# Altium PCB stand.PcbDoc (part 2 of 2)
Units mm, origin at the board's own origin, x right, y up, seen from the top; angles counter-clockwise.
Board outline 152.4 x 292.65 mm, 2 copper layers (Top Layer, Bottom Layer); 16 components, 320 nets, 640 pads, 0 vias.
Unrouted connection lines stored in the file: 32.
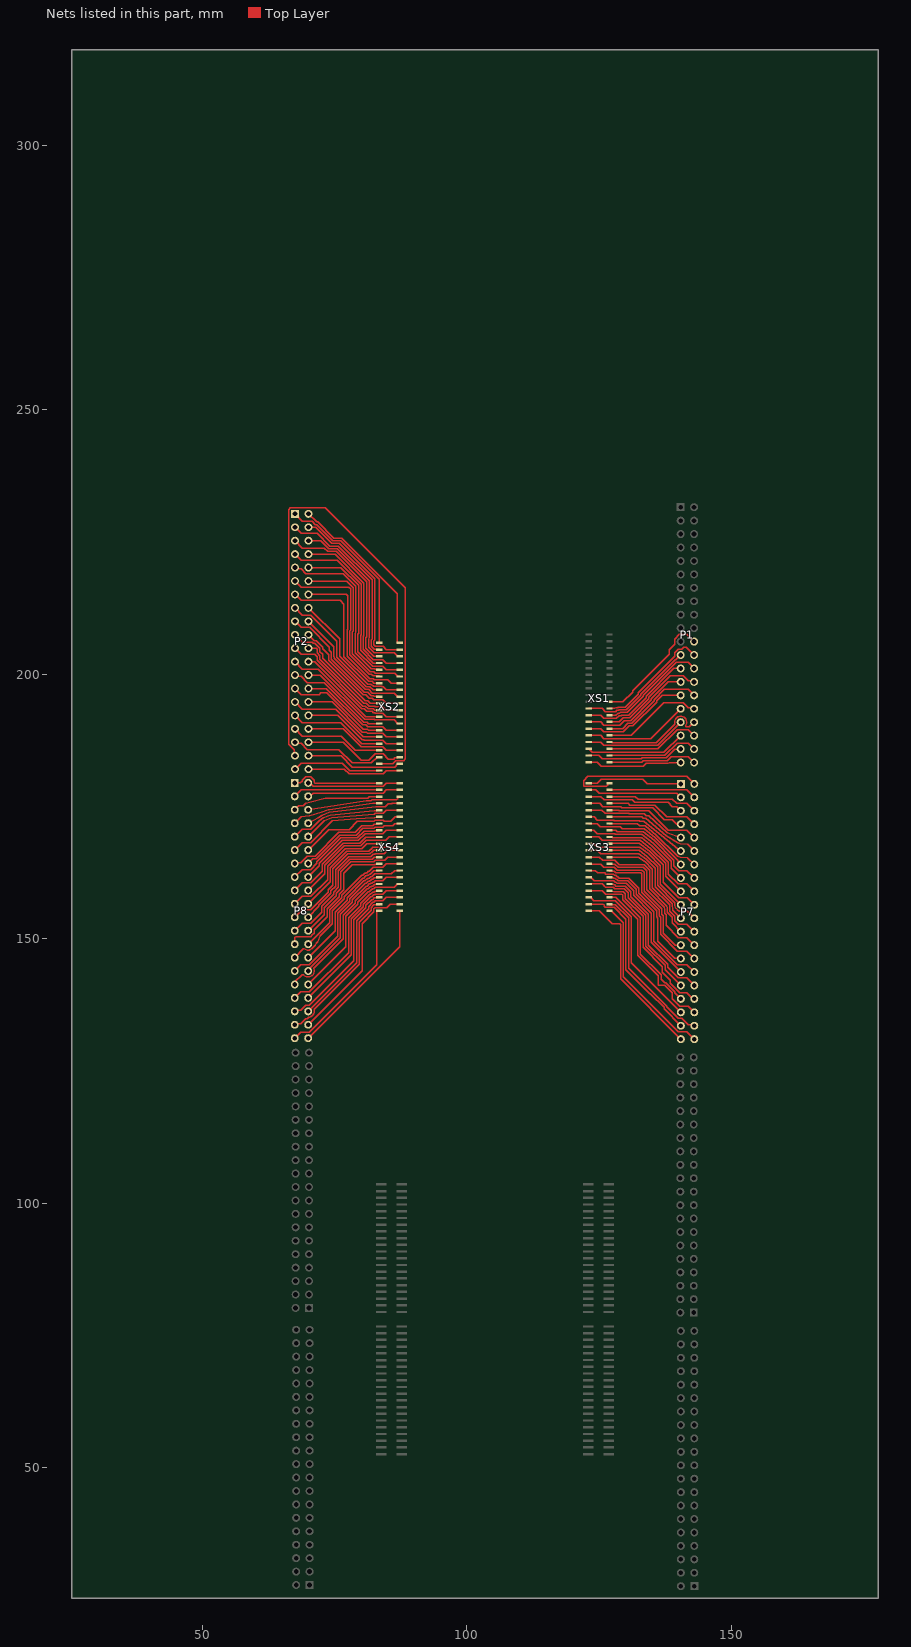
[diagram p2: the nets of this part, all layers, seen from the top]

## Nets (pads, with @x,y where several pads share a name; then routed paths per layer and width w, separated by ;. In a path a pad name is that pad's centre, name@x,y a point inside that pad or via, vN(x,y) a via of type N, cw(c..) or ccw(c..) an arc to the next point about the centre after c; other vN are vias at no path point) (continued)
NetP1_22: P1.22 XS1.22 | length 23.1
  Top Layer w0.254: XS1.22@127.008,194.835 129.56,194.835 131.4,196.675 131.4,196.913 138.328,203.841 138.328,204.661 139.344,205.677 139.344,206.678 140.241,207.575 141.65,207.575 P1.22@143.015,206.21
NetP1_23: P1.23 XS1.23 | length 22.2
  Top Layer w0.254: XS1.23@123.108,193.565 125.644,193.565 126.25,192.959 128.17,192.959 128.424,193.213 128.775,193.213 128.873,193.311 130.191,193.311 132.924,196.044 132.924,196.282 139.411,202.769 139.574,202.769 P1.23@140.475,203.67
NetP1_24: P1.24 XS1.24 | length 22
  Top Layer w0.254: XS1.24@127.008,193.565 128.057,193.565 128.213,193.721 128.565,193.721 128.663,193.819 129.981,193.819 132.416,196.254 132.416,196.492 139.344,203.42 139.344,204.138 140.007,204.801 140.665,204.801 141.014,205.15 141.535,205.15 P1.24@143.015,203.67
NetP1_25: P1.25 XS1.25 | length 21.7
  Top Layer w0.254: XS1.25@123.108,192.295 125.37,192.295 125.976,191.689 128.337,191.689 128.845,192.197 129.196,192.197 129.294,192.295 130.612,192.295 133.94,195.623 133.94,195.861 139.209,201.13 P1.25@140.475,201.13
NetP1_26: P1.26 XS1.26 | length 20.7
  Top Layer w0.254: XS1.26@127.008,192.295 128.224,192.295 128.634,192.705 128.985,192.705 129.083,192.803 130.402,192.803 133.432,195.833 133.432,196.072 139.621,202.261 141.884,202.261 P1.26@143.015,201.13
NetP1_27: P1.27 XS1.27 | length 21.1
  Top Layer w0.254: XS1.27@123.108,191.025 125.37,191.025 125.976,190.419 128.972,190.419 129.832,191.279 131.033,191.279 134.956,195.202 134.956,195.44 138.106,198.59 P1.27@140.475,198.59
NetP1_28: P1.28 XS1.28 | length 20.2
  Top Layer w0.254: XS1.28@127.008,191.025 127.516,191.025 128.859,191.025 129.621,191.787 130.823,191.787 134.448,195.412 134.448,195.651 138.518,199.721 140.943,199.721 141.884,198.78 142.825,198.78 P1.28@143.015,198.59
NetP1_29: P1.29 XS1.29 | length 20.6
  Top Layer w0.254: XS1.29@123.108,189.755 125.37,189.755 125.976,189.149 129.607,189.149 130.721,190.263 131.454,190.263 135.972,194.781 135.972,195.02 137.002,196.05 P1.29@140.475,196.05
NetP1_30: P1.30 XS1.30 | length 19.7
  Top Layer w0.254: XS1.30@127.008,189.755 129.494,189.755 130.51,190.771 131.243,190.771 135.464,194.992 135.464,195.23 137.415,197.181 141.884,197.181 P1.30@143.015,196.05
NetP1_31: P1.31 XS1.31 | length 20
  Top Layer w0.254: XS1.31@123.108,188.485 125.37,188.485 125.976,187.879 134.844,187.879 P1.31@140.475,193.51
NetP1_32: P1.32 XS1.32 | length 19
  Top Layer w0.254: XS1.32@127.008,188.485 131.134,188.485 137.29,194.641 140.943,194.641 141.884,193.7 142.825,193.7 P1.32@143.015,193.51
NetP1_33: P1.33 XS1.33 | length 19.4
  Top Layer w0.254: XS1.33@123.108,187.215 125.37,187.215 125.976,186.609 136.114,186.609 P1.33@140.475,190.97
NetP1_34: P1.34 XS1.34 | length 20.5
  Top Layer w0.254: XS1.34@127.008,187.215 127.481,187.117 135.904,187.117 139.372,190.586 139.372,190.691 139.372,190.718 cw(c140.475,190.97) 141.446,190.389 141.446,190.323 141.446,190.218 141.52,190.143 141.594,190.069 142.114,190.069 P1.34@143.015,190.97
NetP1_35: P1.35 XS1.35 | length 19
  Top Layer w0.254: XS1.35@123.108,185.945 123.772,185.281 127.766,185.281 127.797,185.25 137.295,185.25 P1.35@140.475,188.43
NetP1_36: P1.36 XS1.36 | length 18
  Top Layer w0.254: XS1.36@127.008,185.945 136.168,185.945 139.784,189.561 141.884,189.561 P1.36@143.015,188.43
NetP1_37: P1.37 XS1.37 | length 18.4
  Top Layer w0.254: XS1.37@123.108,184.675 125.002,184.675 125.628,184.048 133.046,184.048 133.232,184.234 137.716,184.234 139.344,185.862 140.447,185.862 P1.37@140.475,185.89
NetP1_38: P1.38 XS1.38 | length 17.4
  Top Layer w0.254: XS1.38@127.008,184.675 132.486,184.675 132.553,184.742 137.505,184.742 139.784,187.021 141.884,187.021 P1.38@143.015,185.89
NetP1_39: P1.39 XS1.39 | length 17.9
  Top Layer w0.254: XS1.39@123.108,183.405 124.689,183.405 125.419,182.675 133.399,182.675 133.942,183.218 138.137,183.218 138.269,183.35 P1.39@140.475,183.35
NetP1_40: P1.40 XS1.40 | length 16.9
  Top Layer w0.254: XS1.40@127.008,183.405 133.121,183.405 133.442,183.726 137.926,183.726 138.681,184.481 141.884,184.481 P1.40@143.015,183.35
NetP2_1: P2.1 XS2.1 | length 33
  Top Layer w0.254: P2.1@67.575,230.355 68.984,228.946 70.806,228.946 71.429,228.323 71.67,228.323 74.718,225.275 76.185,225.275 83.482,217.978 XS2.1@83.482,205.962
NetP2_2: P2.2 XS2.2 | length 32.8
  Top Layer w0.254: P2.2@70.115,230.355 71.639,228.831 71.881,228.831 74.929,225.783 76.396,225.783 86.909,215.27 86.909,206.06 87.007,205.962 XS2.2@87.382,205.962
NetP2_3: P2.3 XS2.3 | length 33
  Top Layer w0.254: P2.3@67.575,227.815 68.73,226.66 71.777,226.66 74.178,224.259 75.765,224.259 82.127,217.897 82.127,206.689 81.993,206.555 81.993,205.369 82.572,204.79 83.384,204.79 XS2.3@83.482,204.692
NetP2_4: P2.4 XS2.4 | length 34.4
  Top Layer w0.254: P2.4@70.115,227.815 71.46,227.815 74.508,224.767 75.975,224.767 82.635,218.107 82.635,206.479 82.501,206.345 82.501,205.579 82.782,205.298 84.24,205.298 84.846,204.692 XS2.4@87.382,204.692
NetP2_5: P2.5 XS2.5 | length 32.5
  Top Layer w0.254: P2.5@67.575,225.275 68.984,223.866 73.134,223.866 73.757,223.243 75.344,223.243 81.111,217.476 81.111,207.11 80.977,206.976 80.977,204.948 82.501,203.424 83.48,203.424 XS2.5@83.482,203.422
NetP2_6: P2.6 XS2.6 | length 33.8
  Top Layer w0.254: P2.6@70.115,225.275 72.443,225.275 73.967,223.751 75.554,223.751 81.619,217.686 81.619,206.899 81.485,206.766 81.485,205.158 82.557,204.086 86.343,204.086 87.007,203.422 XS2.6@87.382,203.422
NetP2_7: P2.7 XS2.7 | length 32
  Top Layer w0.254: P2.7@67.575,222.735 68.706,221.604 75.546,221.604 80.095,217.055 80.095,207.531 79.961,207.397 79.961,204.527 82.336,202.152 XS2.7@83.482,202.152
NetP2_8: P2.8 XS2.8 | length 33.3
  Top Layer w0.254: P2.8@70.115,222.735 75.133,222.735 80.603,217.266 80.603,207.32 80.469,207.186 80.469,204.738 82.39,202.816 84.182,202.816 84.846,202.152 XS2.8@87.382,202.152
NetP2_9: P2.9 XS2.9 | length 31.4
  Top Layer w0.254: P2.9@67.575,220.195 67.766,220.004 68.706,220.004 69.647,219.064 76.649,219.064 79.079,216.634 79.079,207.952 78.945,207.818 78.945,204.106 82.013,201.038 82.681,201.038 82.739,200.98 83.384,200.98 XS2.9@83.482,200.882
NetP2_10: P2.10 XS2.10 | length 32.8
  Top Layer w0.254: P2.10@70.115,220.195 76.236,220.195 79.587,216.845 79.587,207.741 79.453,207.607 79.453,204.317 82.224,201.546 84.182,201.546 84.846,200.882 XS2.10@87.382,200.882
NetP2_11: P2.11 XS2.11 | length 30.9
  Top Layer w0.254: P2.11@67.575,217.655 68.73,216.5 77.776,216.5 78.063,216.213 78.063,208.372 77.929,208.239 77.929,203.685 81.592,200.022 82.009,200.022 82.324,199.707 83.387,199.707 XS2.11@83.482,199.612
NetP2_12: P2.12 XS2.12 | length 32.3
  Top Layer w0.254: P2.12@70.115,217.655 77.34,217.655 78.571,216.424 78.571,208.162 78.437,208.028 78.437,203.896 81.803,200.53 82.47,200.53 82.782,200.218 86.401,200.218 87.007,199.612 XS2.12@87.382,199.612
NetP2_13: P2.13 XS2.13 | length 28.7
  Top Layer w0.254: P2.13@67.575,215.115 68.706,213.984 76.091,213.984 76.825,213.25 76.825,203.353 81.487,198.691 82.146,198.691 82.495,198.342 XS2.13@83.482,198.342
NetP2_14: P2.14 XS2.14 | length 31.1
  Top Layer w0.254: P2.14@70.115,215.115 77.268,215.115 77.555,214.828 77.555,208.583 77.421,208.449 77.421,203.475 81.697,199.199 82.356,199.199 82.549,199.006 85.094,199.006 85.758,198.342 XS2.14@87.382,198.342
NetP2_15: P2.15 XS2.15 | length 24.1
  Top Layer w0.254: P2.15@67.575,212.575 68.984,211.166 70.584,211.166 75.45,206.3 75.45,204.25 75.481,204.219 75.481,203.259 81.066,197.675 81.725,197.675 82.328,197.072 XS2.15@83.482,197.072
NetP2_16: P2.16 XS2.16 | length 25.6
  Top Layer w0.254: P2.16@70.115,212.575 75.989,206.701 75.989,203.47 81.276,198.183 81.935,198.183 82.284,197.834 82.344,197.834 82.442,197.736 84.013,197.736 84.072,197.678 84.24,197.678 84.846,197.072 XS2.16@87.382,197.072
NetP2_17: P2.17 XS2.17 | length 22.9
  Top Layer w0.254: P2.17@67.575,210.035 68.73,208.88 70.329,208.88 74.075,205.134 74.075,204.525 74.434,204.166 74.434,202.87 80.645,196.659 81.304,196.659 82.005,195.958 82.443,195.958 82.501,195.9 83.384,195.9 XS2.17@83.482,195.802
NetP2_18: P2.18 XS2.18 | length 24.4
  Top Layer w0.254: P2.18@70.115,210.035 74.942,205.208 74.942,203.386 74.973,203.355 74.973,203.049 80.855,197.167 81.515,197.167 82.216,196.466 86.343,196.466 87.007,195.802 XS2.18@87.382,195.802
NetP2_19: P2.19 XS2.19 | length 22.1
  Top Layer w0.254: P2.19@67.575,207.495 68.984,206.086 70.806,206.086 71.017,205.875 71.35,205.875 72.275,204.95 72.275,204.293 72.783,203.785 72.783,203.067 80.809,195.041 81.296,195.041 81.805,194.532 XS2.19@83.482,194.532
NetP2_20: P2.20 XS2.20 | length 23.4
  Top Layer w0.254: P2.20@70.115,207.495 71.227,206.383 71.56,206.383 72.783,205.16 72.783,204.827 73.926,203.684 73.926,202.659 80.434,196.151 80.947,196.151 81.648,195.45 82.16,195.45 82.414,195.196 84.182,195.196 84.846,194.532 XS2.20@87.382,194.532
NetP2_21: P2.21 XS2.21 | length 21.2
  Top Layer w0.254: P2.21@67.575,204.955 68.706,203.824 71.308,203.824 71.767,203.365 71.767,202.646 80.388,194.025 80.875,194.025 81.384,193.516 82.359,193.516 82.613,193.262 XS2.21@83.482,193.262
NetP2_22: P2.22 XS2.22 | length 22.9
  Top Layer w0.254: P2.22@70.115,204.955 71.552,204.955 71.767,204.74 71.767,204.083 72.275,203.575 72.275,202.857 80.599,194.533 81.085,194.533 81.594,194.024 82.626,194.024 82.724,193.926 84.182,193.926 84.846,193.262 XS2.22@87.382,193.262
NetP2_23: P2.23 XS2.23 | length 20.2
  Top Layer w0.254: P2.23@67.575,202.415 68.984,201.006 71.97,201.006 74.063,198.913 80.984,191.992 XS2.23@83.482,191.992
NetP2_24: P2.24 XS2.24 | length 21.6
  Top Layer w0.254: P2.24@70.115,202.415 71.28,202.415 80.178,193.517 80.665,193.517 81.174,193.008 82.149,193.008 82.403,192.754 82.626,192.754 82.724,192.656 84.182,192.656 84.846,191.992 XS2.24@87.382,191.992
NetP2_25: P2.25 XS2.25 | length 19.7
  Top Layer w0.254: P2.25@67.575,199.875 67.766,199.684 68.706,199.684 69.925,198.466 73.074,198.466 80.563,190.976 81.19,190.976 81.444,190.722 XS2.25@83.482,190.722
NetP2_26: P2.26 XS2.26 | length 21.1
  Top Layer w0.254: P2.26@70.115,199.875 72.383,199.875 80.774,191.484 82.544,191.484 82.642,191.386 86.343,191.386 87.007,190.722 XS2.26@87.382,190.722
NetP2_27: P2.27 XS2.27 | length 19.4
  Top Layer w0.254: P2.27@67.575,197.335 68.706,196.204 72.179,196.204 72.475,196.5 73.603,196.5 80.495,189.608 81.279,189.608 81.435,189.452 XS2.27@83.482,189.452
NetP2_28: P2.28 XS2.28 | length 20.5
  Top Layer w0.254: P2.28@70.115,197.335 73.486,197.335 80.353,190.468 80.98,190.468 81.332,190.116 84.182,190.116 84.846,189.452 XS2.28@87.382,189.452
NetP2_29: P2.29 XS2.29 | length 18.6
  Top Layer w0.254: P2.29@67.575,194.795 68.984,193.386 75.28,193.386 80.484,188.182 XS2.29@83.482,188.182
NetP2_30: P2.30 XS2.30 | length 20
  Top Layer w0.254: P2.30@70.115,194.795 74.589,194.795 80.284,189.1 81.069,189.1 81.323,188.846 84.182,188.846 84.846,188.182 XS2.30@87.382,188.182
NetP2_31: P2.31 XS2.31 | length 18.1
  Top Layer w0.254: P2.31@67.575,192.255 68.984,190.846 76.231,190.846 80.165,186.912 XS2.31@83.482,186.912
NetP2_32: P2.32 XS2.32 | length 19.5
  Top Layer w0.254: P2.32@70.115,192.255 75.692,192.255 80.273,187.674 80.59,187.674 80.688,187.576 84.182,187.576 84.846,186.912 XS2.32@87.382,186.912
NetP2_33: P2.33 XS2.33 | length 17.6
  Top Layer w0.254: P2.33@67.575,189.715 68.984,188.306 76.31,188.306 78.974,185.642 XS2.33@83.482,185.642
NetP2_34: P2.34 XS2.34 | length 19
  Top Layer w0.254: P2.34@70.115,189.715 76.644,189.715 80.053,186.306 84.182,186.306 84.846,185.642 XS2.34@87.382,185.642
NetP2_35: P2.35 XS2.35 | length 18
  Top Layer w0.254: P2.35@67.575,187.175 67.766,186.984 68.706,186.984 69.925,185.766 75.864,185.766 78.372,183.258 81.993,183.258 83.107,184.372 XS2.35@83.482,184.372
NetP2_36: P2.36 XS2.36 | length 19.7
  Top Layer w0.254: P2.36@70.115,187.175 76.722,187.175 80.131,183.766 81.512,183.766 82.724,184.978 84.24,184.978 85.21,184.008 86.206,184.008 86.472,184.274 86.909,184.274 87.007,184.372 XS2.36@87.382,184.372
NetP2_37: P2.37 XS2.37 | length 113.1
  Top Layer w0.254: P2.37@67.575,184.635 67.385,184.825 67.385,185.766 66.35,186.801 66.35,231.169 66.667,231.486 73.314,231.486 88.4,216.4 88.4,184.026 88.082,183.708 86.624,183.708 86.018,183.102 XS2.37@83.482,183.102
NetP2_38: P2.38 XS2.38 | length 18.4
  Top Layer w0.254: P2.38@70.115,184.635 76.277,184.635 78.415,182.496 86.401,182.496 87.007,183.102 XS2.38@87.382,183.102
NetP2_39: P2.39 XS2.39 | length 17
  Top Layer w0.254: P2.39@67.575,182.095 68.706,183.226 76.499,183.226 77.893,181.832 XS2.39@83.482,181.832
NetP2_40: P2.40 XS2.40 | length 17.9
  Top Layer w0.254: P2.40@70.115,182.095 76.912,182.095 77.78,181.226 84.24,181.226 84.846,181.832 XS2.40@87.382,181.832
NetP7_1: P7.1 XS3.1 | length 18.1
  Top Layer w0.254: XS3.1@123.108,179.437 124.689,179.437 125.414,180.162 133.325,180.162 134.177,179.31 P7.1@140.51,179.31
NetP7_2: P7.2 XS3.2 | length 28.3
  Top Layer w0.254: XS3.2@127.008,179.437 126.644,179.437 126.644,179.07 126.39,178.816 122.123,178.816 122.123,179.934 122.936,180.746 141.614,180.746 P7.2@143.05,179.31
NetP7_3: P7.3 XS3.3 | length 18
  Top Layer w0.254: XS3.3@123.108,178.167 124.449,178.167 125.07,177.546 139.734,177.546 P7.3@140.51,176.77
NetP7_4: P7.4 XS3.4 | length 16.6
  Top Layer w0.254: XS3.4@127.008,178.167 139.358,178.167 139.37,178.156 141.664,178.156 P7.4@143.05,176.77
NetP7_5: P7.5 XS3.5 | length 18.5
  Top Layer w0.254: XS3.5@123.108,176.897 125.388,176.897 126.009,176.276 131.324,176.276 131.788,175.812 138.083,175.812 138.87,175.024 139.716,175.024 P7.5@140.51,174.23
NetP7_6: P7.6 XS3.6 | length 17.1
  Top Layer w0.254: XS3.6@127.008,176.897 131.928,176.897 132.436,176.389 138.927,176.389 139.7,175.616 141.664,175.616 P7.6@143.05,174.23
NetP7_7: P7.7 XS3.7 | length 19
  Top Layer w0.254: XS3.7@123.108,175.627 125.134,175.627 125.781,174.981 129.147,174.981 129.362,174.765 135.166,174.765 137.389,172.542 138.836,172.542 139.689,171.69 P7.7@140.51,171.69
NetP7_8: P7.8 XS3.8 | length 17.7
  Top Layer w0.254: XS3.8@127.008,175.627 130.52,175.627 130.874,175.273 135.595,175.273 137.796,173.072 141.668,173.072 P7.8@143.05,171.69
NetP7_9: P7.9 XS3.9 | length 19.3
  Top Layer w0.254: XS3.9@123.108,174.357 125.566,174.357 126.213,173.711 130.669,173.711 130.727,173.653 133.622,173.653 133.999,173.276 134.474,173.276 137.914,170.036 P7.9@140.51,169.15
NetP7_10: P7.10 XS3.10 | length 18.2
  Top Layer w0.254: XS3.10@127.008,174.357 128.742,174.357 128.842,174.257 134.412,174.257 138.124,170.544 141.656,170.544 P7.10@143.05,169.15
NetP7_11: P7.11 XS3.11 | length 19.7
  Top Layer w0.254: XS3.11@123.108,173.087 124.104,173.087 124.751,172.441 127.865,172.441 127.923,172.383 132.617,172.383 132.725,172.275 133.533,172.275 137.396,169.126 P7.11@140.51,166.61
NetP7_12: P7.12 XS3.12 | length 18.3
  Top Layer w0.254: XS3.12@127.008,173.087 133.094,173.087 133.398,172.783 133.836,172.783 137.712,169.528 139.922,168.184 ccw(c140.51,169.15) 140.382,168.026 141.791,167.869 141.866,167.794 P7.12@143.05,166.61
NetP7_13: P7.13 XS3.13 | length 20.6
  Top Layer w0.254: XS3.13@123.108,171.817 124.677,171.817 125.298,171.196 129.032,171.196 129.427,170.801 133.565,170.801 135.674,169.121 139.691,165.104 P7.13@140.51,164.07
NetP7_14: P7.14 XS3.14 | length 19
  Top Layer w0.254: XS3.14@127.008,171.817 132.297,171.817 132.766,171.348 133.742,171.348 135.884,169.629 139.712,165.808 ccw(c140.51,166.61) 140.401,165.484 141.766,165.354 141.84,165.28 P7.14@143.05,164.07
NetP7_15: P7.15 XS3.15 | length 21.8
  Top Layer w0.254: XS3.15@123.108,170.547 124.028,170.547 124.675,169.901 127.991,169.901 128.118,169.774 133.155,169.774 135.253,168.105 138.675,164.683 138.675,163.365 P7.15@140.51,161.53
NetP7_16: P7.16 XS3.16 | length 20.3
  Top Layer w0.254: XS3.16@127.008,170.547 128.243,170.547 128.497,170.293 133.354,170.293 135.463,168.613 139.183,164.893 139.183,163.797 140.065,162.916 141.664,162.916 P7.16@143.05,161.53
NetP7_17: P7.17 XS3.17 | length 23
  Top Layer w0.254: XS3.17@123.108,169.277 124.99,169.277 125.654,168.613 132.879,168.613 134.832,167.089 137.659,164.262 137.659,161.841 P7.17@140.51,158.99
NetP7_18: P7.18 XS3.18 | length 21.5
  Top Layer w0.254: XS3.18@127.008,169.277 127.481,169.277 127.637,169.121 133.089,169.121 135.042,167.597 138.167,164.472 138.167,162.273 140.042,160.399 141.641,160.399 P7.18@143.05,158.99
NetP7_19: P7.19 XS3.19 | length 24.1
  Top Layer w0.254: XS3.19@123.108,168.007 124.028,168.007 124.675,167.361 132.695,167.361 134.411,166.073 136.643,163.841 136.643,160.317 P7.19@140.51,156.45
NetP7_20: P7.20 XS3.20 | length 22.7
  Top Layer w0.254: XS3.20@127.008,168.007 127.106,168.105 127.63,168.105 132.669,168.105 134.622,166.581 137.151,164.052 137.151,160.749 140.13,157.77 141.73,157.77 P7.20@143.05,156.45
NetP7_21: P7.21 XS3.21 | length 25.3
  Top Layer w0.254: XS3.21@123.108,166.737 124.728,166.737 125.392,166.073 132.545,166.073 133.99,165.057 135.553,163.495 135.627,163.42 135.627,159.896 138.871,156.652 138.871,156.457 ccw(c140.51,156.45) 138.954,155.935 138.954,155.468 140.51,153.912 P7.21@140.51,153.91
NetP7_22: P7.22 XS3.22 | length 23.8
  Top Layer w0.254: XS3.22@127.008,166.737 132.6,166.737 134.201,165.565 136.061,163.705 136.135,163.631 136.135,160.107 139.379,156.863 139.379,156.457 ccw(c140.51,156.45) 139.816,155.557 140.231,155.235 141.725,155.235 P7.22@143.05,153.91
NetP7_23: P7.23 XS3.23 | length 26.6
  Top Layer w0.254: XS3.23@123.108,165.467 125.094,165.467 125.702,164.859 128.044,164.859 128.861,164.041 133.569,164.041 134.537,163.074 134.611,162.999 134.611,159.475 137.865,156.221 ccw(c140.51,156.45) 137.938,155.791 137.938,155.047 138.862,154.124 138.862,153.018 P7.23@140.51,151.37
NetP7_24: P7.24 XS3.24 | length 25
  Top Layer w0.254: XS3.24@127.008,165.467 132.433,165.467 133.78,164.549 135.045,163.284 135.119,163.21 135.119,159.686 138.363,156.442 ccw(c140.51,156.45) 138.446,155.859 138.446,155.258 139.37,154.334 139.37,153.416 140.03,152.756 141.664,152.756 P7.24@143.05,151.37
NetP7_25: P7.25 XS3.25 | length 28.4
  Top Layer w0.254: XS3.25@123.108,164.197 123.206,164.099 125.376,164.099 125.942,163.533 127.933,163.533 128.441,163.025 133.149,163.025 133.521,162.653 133.595,162.579 133.595,159.054 136.908,155.741 ccw(c140.51,156.45) 136.922,155.674 136.922,154.627 137.195,154.354 137.195,151.068 139.434,148.83 P7.25@140.51,148.83
NetP7_26: P7.26 XS3.26 | length 26.3
  Top Layer w0.254: XS3.26@127.008,164.197 127.072,164.133 128.051,164.133 128.651,163.533 133.359,163.533 134.029,162.863 134.103,162.789 134.103,159.265 137.381,155.987 ccw(c140.51,156.45) 137.43,155.73 137.43,154.837 137.703,154.564 137.703,152.577 140.042,150.239 141.641,150.239 P7.26@143.05,148.83
NetP7_27: P7.27 XS3.27 | length 28.1
  Top Layer w0.254: XS3.27@123.108,162.927 124.304,162.927 124.756,162.475 126.096,162.475 126.308,162.263 127.766,162.263 128.02,162.009 128.235,162.009 128.489,161.755 128.607,161.755 128.861,161.501 130.645,161.501 132.579,159.567 132.579,158.634 135.906,155.307 135.906,154.206 136.179,153.933 136.179,149.518 139.379,146.318 140.482,146.318 P7.27@140.51,146.29
NetP7_28: P7.28 XS3.28 | length 27.6
  Top Layer w0.254: XS3.28@127.008,162.927 127.106,162.829 127.918,162.829 128.23,162.517 132.938,162.517 133.013,162.443 133.087,162.368 133.087,158.844 136.414,155.517 136.414,154.416 136.687,154.143 136.687,150.858 139.846,147.699 141.641,147.699 P7.28@143.05,146.29
NetP7_29: P7.29 XS3.29 | length 28.6
  Top Layer w0.254: XS3.29@123.108,161.657 123.483,161.657 124.147,160.993 127.814,160.993 128.068,160.739 128.187,160.739 128.441,160.485 130.224,160.485 131.563,159.146 131.563,158.213 134.89,154.886 134.89,149.37 P7.29@140.51,143.75
NetP7_30: P7.30 XS3.30 | length 27.2
  Top Layer w0.254: XS3.30@127.008,161.657 127.106,161.559 127.751,161.559 127.809,161.501 128.025,161.501 128.279,161.247 128.397,161.247 128.651,160.993 130.434,160.993 132.071,159.356 132.071,158.423 135.398,155.096 135.398,149.58 139.819,145.159 141.641,145.159 P7.30@143.05,143.75
NetP7_31: P7.31 XS3.31 | length 29.8
  Top Layer w0.254: XS3.31@123.108,160.387 125.644,160.387 125.794,160.237 125.878,160.237 126.027,160.089 126.027,160.004 126.308,159.723 127.766,159.723 128.02,159.469 129.803,159.469 130.547,158.725 130.547,157.792 133.874,154.465 133.874,148.64 137.516,144.998 137.516,144.204 P7.31@140.51,141.21
NetP7_32: P7.32 XS3.32 | length 28.3
  Top Layer w0.254: XS3.32@127.008,160.387 127.106,160.289 127.8,160.289 127.858,160.231 127.976,160.231 128.23,159.977 130.013,159.977 131.055,158.935 131.055,158.002 134.382,154.675 134.382,148.85 138.024,145.208 138.024,144.637 140.042,142.619 141.641,142.619 P7.32@143.05,141.21
NetP7_33: P7.33 XS3.33 | length 31.1
  Top Layer w0.254: XS3.33@123.108,159.117 125.644,159.117 126.308,158.453 129.382,158.453 129.531,158.304 129.531,157.371 132.858,154.044 132.858,147.142 136.761,143.239 136.761,142.419 137.435,141.745 137.657,141.745 139.368,140.034 139.368,139.812 P7.33@140.51,138.67
NetP7_34: P7.34 XS3.34 | length 29.4
  Top Layer w0.254: XS3.34@127.008,159.117 127.481,159.019 127.809,158.961 129.593,158.961 130.039,158.515 130.039,157.582 133.366,154.255 133.366,148.429 137.008,144.787 137.008,143.71 138.525,142.194 138.525,141.596 140.32,139.801 141.656,139.801 142.787,138.67 P7.34@143.05,138.67
NetP7_35: P7.35 XS3.35 | length 31.5
  Top Layer w0.254: XS3.35@123.108,157.847 123.483,157.847 124.089,157.241 128.077,157.241 131.133,154.185 131.133,145.507 P7.35@140.51,136.13
NetP7_36: P7.36 XS3.36 | length 30.6
  Top Layer w0.254: XS3.36@127.008,157.847 128.19,157.847 132.35,153.687 132.35,146.932 136.253,143.028 136.253,141.327 136.344,141.237 137.447,141.237 138.86,139.823 138.86,138.72 140.296,137.285 141.895,137.285 P7.36@143.05,136.13
NetP7_37: P7.37 XS3.37 | length 32.8
  Top Layer w0.254: XS3.37@123.108,156.577 125.878,156.577 126.027,156.428 126.027,156.194 126.25,155.971 127.911,155.971 130.117,153.765 130.117,144.205 134.67,139.652 134.741,139.652 137.336,137.057 137.336,136.764 P7.37@140.51,133.59
NetP7_38: P7.38 XS3.38 | length 31.2
  Top Layer w0.254: XS3.38@127.008,156.577 127.085,156.5 128.1,156.5 130.625,153.975 130.625,144.416 134.88,140.16 134.952,140.16 137.844,137.268 137.844,137.196 140.042,134.999 140.7,134.999 141.919,133.78 142.86,133.78 P7.38@143.05,133.59
NetP7_39: P7.39 XS3.39 | length 33.5
  Top Layer w0.254: XS3.39@123.108,155.307 125.123,155.307 127.559,152.871 128.952,152.871 129.101,152.722 129.101,142.459 P7.39@140.51,131.05
NetP7_40: P7.40 XS3.40 | length 32.1
  Top Layer w0.254: XS3.40@127.008,155.307 127.383,155.307 129.609,153.081 129.609,142.892 140.042,132.459 141.641,132.459 P7.40@143.05,131.05
NetP8_1: P8.1 XS4.1 | length 17.2
  Top Layer w0.254: P8.1@67.525,179.495 68.604,179.495 68.934,179.825 68.934,179.963 69.597,180.626 70.533,180.626 71.196,179.963 71.196,179.586 71.345,179.437 XS4.1@83.482,179.437
NetP8_2: P8.2 XS4.2 | length 17.8
  Top Layer w0.254: P8.2@70.065,179.495 70.336,179.495 71,178.831 84.24,178.831 84.846,179.437 XS4.2@87.382,179.437
NetP8_3: P8.3 XS4.3 | length 16.5
  Top Layer w0.254: P8.3@67.525,176.955 68.737,178.167 XS4.3@83.482,178.167
NetP8_4: P8.4 XS4.4 | length 17.8
  Top Layer w0.254: P8.4@70.065,176.955 70.402,176.955 71.008,177.561 84.24,177.561 84.846,178.167 XS4.4@87.382,178.167
NetP8_5: P8.5 XS4.5 | length 16.7
  Top Layer w0.254: P8.5@67.525,174.415 68.287,175.177 69.164,175.177 69.604,175.617 69.679,175.692 70.341,175.858 ccw(c70.065,176.955) 70.349,175.86 73.264,176.616 81.304,176.616 81.585,176.897 XS4.5@83.482,176.897
NetP8_6: P8.6 XS4.6 | length 18
  Top Layer w0.254: P8.6@70.065,174.415 81.012,176.108 81.954,176.108 82.121,176.276 86.741,176.276 86.995,176.53 86.995,176.897 XS4.6@87.382,176.897
NetP8_7: P8.7 XS4.7 | length 16.7
  Top Layer w0.254: P8.7@67.525,171.875 68.727,173.077 70.228,173.296 ccw(c70.065,174.415) 70.278,173.304 ccw(c70.065,174.415) 70.379,173.329 72.51,173.945 73.853,174.397 74,174.423 82.303,175.627 XS4.7@83.482,175.627
NetP8_8: P8.8 XS4.8 | length 18.1
  Top Layer w0.254: P8.8@70.065,171.875 71.969,172.914 72.687,173.408 74.089,173.915 82.793,175.021 84.595,175.021 85.158,175.584 85.885,175.584 85.928,175.627 XS4.8@87.382,175.627
NetP8_9: P8.9 XS4.9 | length 17.5
  Top Layer w0.254: P8.9@67.525,169.335 68.934,170.744 70.533,170.744 72.14,172.351 72.88,172.886 74.271,173.402 82.572,174.259 83.009,174.259 XS4.9@83.482,174.357
NetP8_10: P8.10 XS4.10 | length 19.2
  Top Layer w0.254: P8.10@70.065,169.335 73.081,172.351 74.475,172.891 82.558,173.527 82.782,173.751 84.24,173.751 84.846,174.357 XS4.10@87.382,174.357 ; P8.10@70.065,169.955 70.214,170.104
NetP8_11: P8.11 XS4.11 | length 18.3
  Top Layer w0.254: P8.11@67.525,166.795 68.934,168.204 70.533,168.204 74.655,172.326 79.147,172.708 82.514,172.931 82.681,172.931 83.009,172.989 XS4.11@83.482,173.087
NetP8_12: P8.12 XS4.12 | length 20.1
  Top Layer w0.254: P8.12@70.065,166.795 73.915,170.645 77.802,170.645 79.357,172.2 82.501,172.2 82.724,172.423 84.24,172.423 84.463,172.2 85.655,172.2 86.542,173.087 XS4.12@87.382,173.087
NetP8_13: P8.13 XS4.13 | length 19.1
  Top Layer w0.254: P8.13@67.525,164.255 67.715,164.445 68.656,164.445 69.875,165.664 71.368,165.664 75.841,170.137 78.926,170.137 80.196,171.407 82.26,171.407 82.514,171.661 82.681,171.661 82.739,171.719 83.384,171.719 XS4.13@83.482,171.817
NetP8_14: P8.14 XS4.14 | length 20.4
  Top Layer w0.254: P8.14@70.065,164.255 70.966,165.156 71.578,165.156 76.051,169.629 79.137,169.629 80.407,170.899 82.47,170.899 82.724,171.153 84.182,171.153 84.429,171.4 86.031,171.4 86.448,171.817 XS4.14@87.382,171.817
NetP8_15: P8.15 XS4.15 | length 19.8
  Top Layer w0.254: P8.15@67.525,161.715 68.934,163.124 70.533,163.124 71.691,164.282 71.691,164.55 76.262,169.121 79.347,169.121 80.617,170.391 82.681,170.391 82.739,170.449 83.384,170.449 XS4.15@83.482,170.547
NetP8_16: P8.16 XS4.16 | length 21.3
  Top Layer w0.254: P8.16@70.065,161.715 72.199,163.849 72.199,164.34 76.472,168.613 79.558,168.613 80.828,169.883 84.182,169.883 84.846,170.547 XS4.16@87.382,170.547
NetP8_17: P8.17 XS4.17 | length 20.9
  Top Layer w0.254: P8.17@67.525,159.175 68.934,160.584 70.533,160.584 72.707,162.758 72.707,164.13 76.683,168.105 79.768,168.105 80.922,169.259 83.464,169.259 XS4.17@83.482,169.277
NetP8_18: P8.18 XS4.18 | length 22.4
  Top Layer w0.254: P8.18@70.065,159.175 73.215,162.325 73.215,163.919 76.893,167.597 79.979,167.597 81.032,168.65 84.729,168.65 85.355,169.277 XS4.18@87.382,169.277
NetP8_19: P8.19 XS4.19 | length 22.1
  Top Layer w0.254: P8.19@67.525,156.635 68.934,158.044 70.533,158.044 73.723,161.234 73.723,163.709 77.103,167.089 80.189,167.089 81.107,168.007 XS4.19@83.482,168.007
NetP8_20: P8.20 XS4.20 | length 23.6
  Top Layer w0.254: P8.20@70.065,156.635 74.231,160.801 74.231,163.498 77.314,166.581 81.514,166.581 81.924,166.991 81.953,166.991 82.305,167.343 86.343,167.343 87.007,168.007 XS4.20@87.382,168.007
NetP8_21: P8.21 XS4.21 | length 23.3
  Top Layer w0.254: P8.21@67.525,154.095 68.934,155.504 70.533,155.504 73.865,158.836 73.865,159.278 74.739,160.152 74.739,163.288 77.524,166.073 81.725,166.073 82.135,166.483 82.163,166.483 82.417,166.737 XS4.21@83.482,166.737
NetP8_22: P8.22 XS4.22 | length 24.8
  Top Layer w0.254: P8.22@70.065,154.095 72.105,156.135 72.105,156.351 74.373,158.619 74.373,159.068 75.247,159.942 75.247,163.077 77.735,165.565 81.935,165.565 82.345,165.975 82.626,165.975 82.782,166.131 84.402,166.131 85.008,166.737 XS4.22@87.382,166.737
NetP8_23: P8.23 XS4.23 | length 24.5
  Top Layer w0.254: P8.23@67.525,151.555 68.934,152.964 70.533,152.964 72.613,155.044 72.613,156.141 74.881,158.409 74.881,158.857 75.755,159.731 75.755,162.867 77.945,165.057 81.727,165.057 82.145,165.057 82.555,165.467 XS4.23@83.482,165.467
NetP8_24: P8.24 XS4.24 | length 26
  Top Layer w0.254: P8.24@70.065,151.555 73.121,154.611 73.121,155.93 75.389,158.198 75.389,158.647 76.263,159.521 76.263,162.657 78.156,164.549 81.937,164.549 82.47,164.549 82.782,164.861 84.543,164.861 85.149,165.467 XS4.24@87.382,165.467
NetP8_25: P8.25 XS4.25 | length 26.4
  Top Layer w0.254: P8.25@67.525,149.015 67.525,150.193 67.525,150.283 67.674,150.432 67.884,150.432 67.892,150.424 70.061,150.424 70.065,150.424 70.533,150.424 70.865,150.755 71.196,151.087 71.196,151.555 71.196,151.778 73.629,154.211 73.629,155.72 75.897,157.988 75.897,158.436 76.771,159.311 76.771,162.446 78.366,164.041 82.681,164.041 82.739,164.099 83.384,164.099 XS4.25@83.482,164.197
NetP8_26: P8.26 XS4.26 | length 25.3
  Top Layer w0.254: P8.26@70.065,149.015 74.137,153.087 74.137,155.51 76.405,157.778 76.405,158.226 80.188,162.009 80.366,162.009 80.776,162.419 80.943,162.419 81.041,162.517 81.208,162.517 81.462,162.771 81.628,162.771 82.39,163.533 84.182,163.533 84.846,164.197 XS4.26@87.382,164.197
NetP8_27: P8.27 XS4.27 | length 24.9
  Top Layer w0.254: P8.27@67.525,146.475 69.177,148.127 69.282,148.127 69.365,148.127 ccw(c70.065,149.015) 70.865,148.215 ccw(c66.459,152.621) 72.345,150.576 74.645,152.877 74.645,155.299 76.913,157.567 76.913,158.016 80.398,161.501 80.576,161.501 80.986,161.911 81.153,161.911 81.251,162.009 81.418,162.009 81.672,162.263 81.839,162.263 82.501,162.925 83.48,162.925 XS4.27@83.482,162.927
NetP8_28: P8.28 XS4.28 | length 26.5
  Top Layer w0.254: P8.28@70.065,146.475 75.153,151.563 75.153,155.089 77.421,157.357 77.421,157.805 80.609,160.993 80.787,160.993 81.197,161.403 81.364,161.403 81.462,161.501 81.628,161.501 81.882,161.755 82.049,161.755 82.615,162.321 85.79,162.321 86.396,162.927 XS4.28@87.382,162.927
NetP8_29: P8.29 XS4.29 | length 26.1
  Top Layer w0.254: P8.29@67.525,143.935 68.68,145.09 70.279,145.09 75.661,150.472 75.661,154.878 77.929,157.146 77.929,157.595 80.819,160.485 80.997,160.485 81.407,160.895 81.574,160.895 81.672,160.993 81.839,160.993 82.093,161.247 82.26,161.247 82.572,161.559 83.384,161.559 XS4.29@83.482,161.657
NetP8_30: P8.30 XS4.30 | length 27.6
  Top Layer w0.254: P8.30@70.065,143.935 70.065,144.157 76.169,150.261 76.169,154.668 78.437,156.936 78.437,157.384 81.03,159.977 81.208,159.977 81.618,160.387 81.784,160.387 81.882,160.485 82.049,160.485 82.303,160.739 82.47,160.739 82.724,160.993 84.182,160.993 84.846,161.657 XS4.30@87.382,161.657
NetP8_31: P8.31 XS4.31 | length 27.9
  Top Layer w0.254: P8.31@67.525,141.395 67.525,141.875 68.922,143.272 69.027,143.272 69.132,143.272 69.207,143.198 ; 69.207,143.197 69.213,143.192 ccw(c70.065,143.935) 71.124,144.332 71.124,144.375 71.124,144.481 76.677,150.034 76.677,154.458 78.945,156.725 78.945,157.174 81.24,159.469 81.418,159.469 81.828,159.879 81.995,159.879 82.093,159.977 82.26,159.977 82.514,160.231 82.681,160.231 82.739,160.289 83.384,160.289 XS4.31@83.482,160.387
NetP8_32: P8.32 XS4.32 | length 28.8
  Top Layer w0.254: P8.32@70.065,141.395 77.185,148.515 77.185,154.247 79.453,156.515 79.453,156.963 81.45,158.961 81.628,158.961 82.038,159.371 82.205,159.371 82.303,159.469 82.47,159.469 82.724,159.723 82.891,159.723 82.921,159.753 86.373,159.753 87.007,160.387 XS4.32@87.382,160.387
NetP8_33: P8.33 XS4.33 | length 28.5
  Top Layer w0.254: P8.33@67.525,138.855 68.68,140.01 70.279,140.01 77.693,147.424 77.693,154.037 79.961,156.305 79.961,156.753 81.661,158.453 81.839,158.453 82.249,158.863 82.416,158.863 82.514,158.961 82.681,158.961 82.739,159.019 83.384,159.019 XS4.33@83.482,159.117
NetP8_34: P8.34 XS4.34 | length 30
  Top Layer w0.254: P8.34@70.065,138.855 78.201,146.991 78.201,153.826 80.469,156.094 80.469,156.543 81.871,157.945 82.049,157.945 82.459,158.355 82.626,158.355 82.724,158.453 84.182,158.453 84.846,159.117 XS4.34@87.382,159.117
NetP8_35: P8.35 XS4.35 | length 29.7
  Top Layer w0.254: P8.35@67.525,136.315 67.715,136.505 68.656,136.505 69.62,137.47 70.279,137.47 78.709,145.9 78.709,153.616 80.977,155.884 80.977,156.332 82.082,157.437 82.26,157.437 82.572,157.749 83.384,157.749 XS4.35@83.482,157.847
NetP8_36: P8.36 XS4.36 | length 31.1
  Top Layer w0.254: P8.36@70.065,136.315 79.217,145.467 79.217,153.405 81.485,155.673 81.485,156.122 82.292,156.929 82.47,156.929 82.724,157.183 84.182,157.183 84.846,157.847 XS4.36@87.382,157.847
NetP8_37: P8.37 XS4.37 | length 30.8
  Top Layer w0.254: P8.37@67.525,133.775 67.715,133.965 68.656,133.965 69.62,134.93 69.821,134.93 69.926,134.93 70.207,135.193 ccw(c70.065,136.315) 71.168,136.567 71.168,136.594 71.168,136.699 79.725,145.257 79.725,153.195 81.993,155.463 81.993,155.911 82.503,156.421 82.681,156.421 82.739,156.479 XS4.37@83.554,156.479
NetP8_38: P8.38 XS4.38 | length 32.3
  Top Layer w0.254: P8.38@70.065,133.775 80.3,144.01 80.3,152.9 82.501,155.101 82.501,155.69 82.724,155.913 84.897,155.913 85.561,156.577 XS4.38@87.382,156.577
NetP8_39: P8.39 XS4.39 | length 31.8
  Top Layer w0.254: P8.39@67.525,131.235 68.68,132.39 70.279,132.39 83.009,145.12 83.009,155.209 83.107,155.307 XS4.39@83.482,155.307
NetP8_40: P8.40 XS4.40 | length 31.2
  Top Layer w0.254: P8.40@70.065,131.235 87.382,148.552 XS4.40@87.382,155.307